# EAGLE board Orthogon - v2 panel (EAGLE 8.7.1)
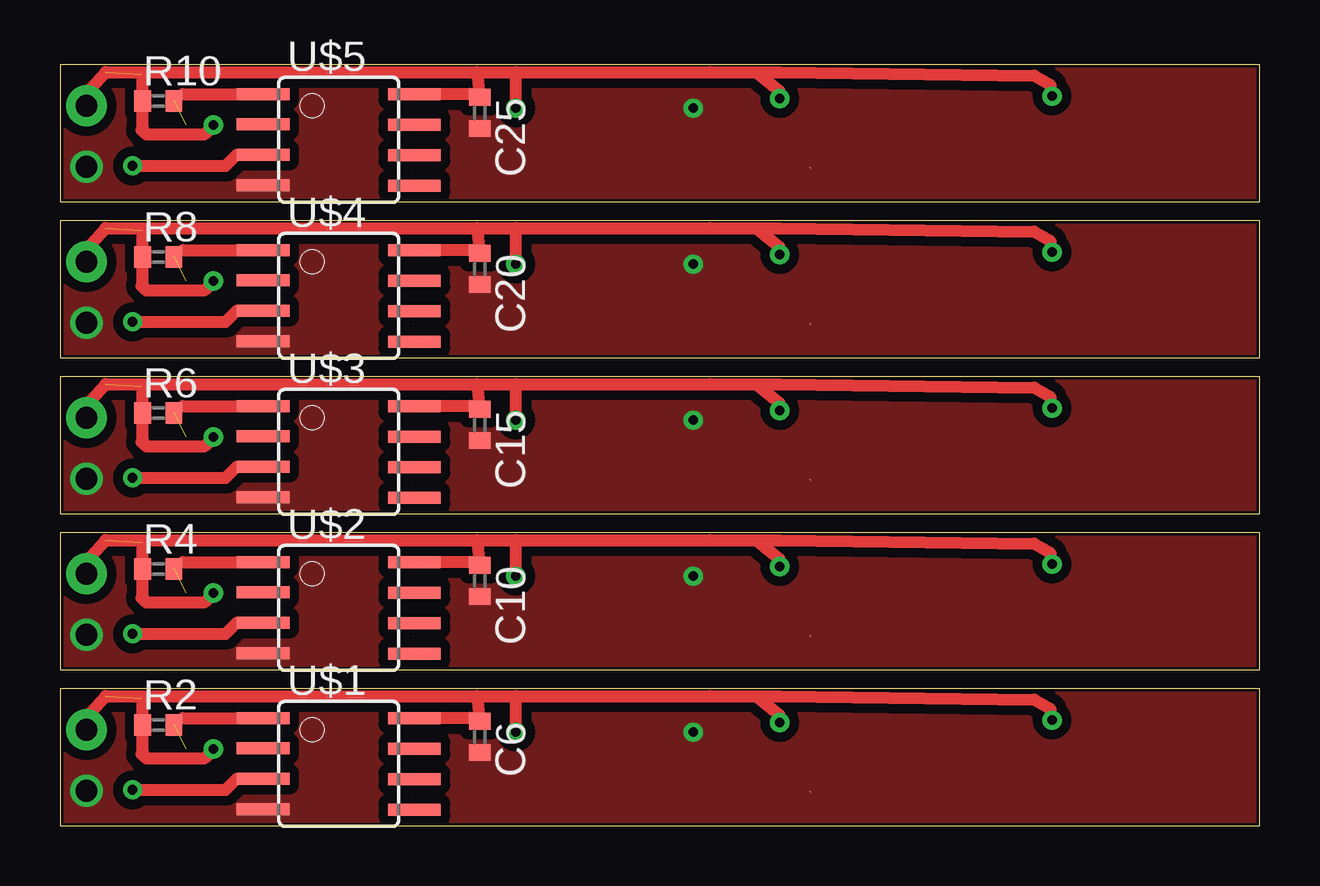
[diagram p0: board, top side]
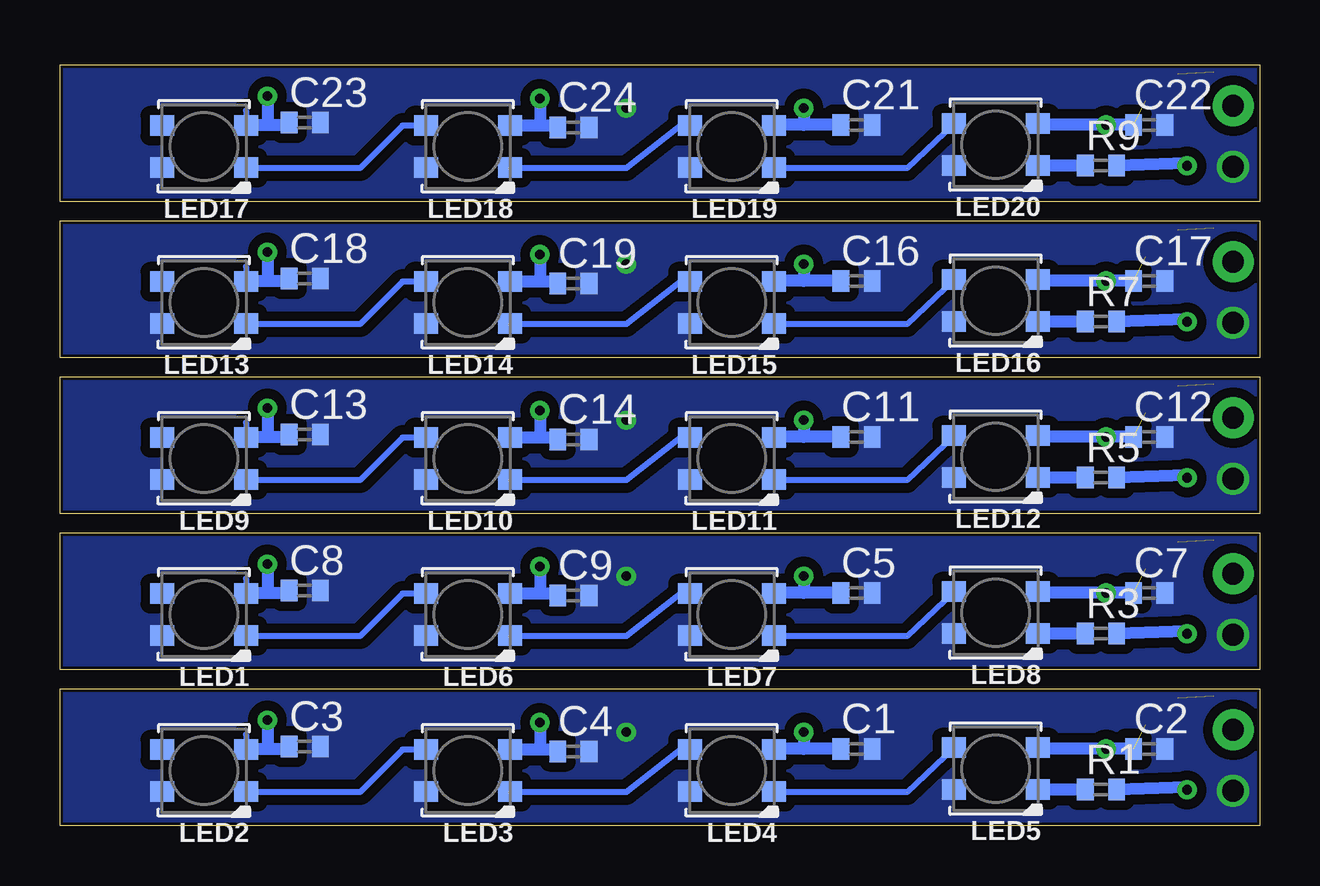
[diagram p1: board, bottom side, seen from below]

Size 50 x 31.7 mm. Coordinates in mm from the lower left corner, seen from the top.
Outline: 0,0 50,0 50,5.7 0,5.7 0,0
Outline: 0,6.5 50,6.5 50,12.2 0,12.2 0,6.5
Outline: 0,13 50,13 50,18.7 0,18.7 0,13
Outline: 0,19.5 50,19.5 50,25.2 0,25.2 0,19.5
Outline: 0,26 50,26 50,31.7 0,31.7 0,26
Copper layers (1*16): Top 0.035mm / dielectric 1.5mm / Bottom 0.035mm
Design rules "default *": minimum track width 0.25mm, minimum drill 0.4mm, track to track 0.4mm, track to pad 0.4mm, pad to pad 0.4mm, via to via 0.4mm, smd to smd 0.4mm, copper to edge 0.1mm, drill to drill 0.1mm, minimum pad ring 10mil, minimum via ring 8mil, stop-mask expansion 4mil, vias tented up to drill 0mil, thermal gap 10mil
Net classes: 1 Signal: width 0.25 mm, drill 0.4 mm, clearance 0.4 mm; 2 +5V: width 0.5 mm, drill 0.4 mm, clearance 0.4 mm; 5 CLEAR: width 0.1 mm, drill 0.4 mm, clearance 1.5 mm

## Footprints (pad centres in the part's own frame; a part is rotated, then mirrored left to right if it is on the bottom)
C0402 = smd 0.7 x 0.9: 1 -0.65,0; 2 0.65,0
LED3535 = smd 1 x 0.85: 1 -1.75,0.875; 2 -1.75,-0.875; 3 1.75,-0.875; 4 1.75,0.875
R0402 = smd 0.7 x 0.9: 1 -0.65,0; 2 0.65,0
SOIC8 = smd 0.5 x 2.2: 1 -1.905,-3.154; 2 -0.645,-3.154; 3 0.625,-3.154; 4 1.895,-3.154; 5 1.905,3.154; 6 0.635,3.154; 7 -0.635,3.154; 8 -1.905,3.154

## Placement (x,y rotation side)
C1  100 nF  [C0402]  16.8,3.2 0 bottom
C2  100 nF  [C0402]  4.6,3.2 0 bottom
C3  100 nF  [C0402]  39.8,3.3 0 bottom
C4  100 nF  [C0402]  28.6,3.1 0 bottom
C5  100 nF  [C0402]  16.8,9.7 0 bottom
C6  100 nF  [C0402]  17.5,3.7 270 top
C7  100 nF  [C0402]  4.6,9.7 0 bottom
C8  100 nF  [C0402]  39.8,9.8 0 bottom
C9  100 nF  [C0402]  28.6,9.6 0 bottom
C10  100 nF  [C0402]  17.5,10.2 270 top
C11  100 nF  [C0402]  16.8,16.2 0 bottom
C12  100 nF  [C0402]  4.6,16.2 0 bottom
C13  100 nF  [C0402]  39.8,16.3 0 bottom
C14  100 nF  [C0402]  28.6,16.1 0 bottom
C15  100 nF  [C0402]  17.5,16.7 270 top
C16  100 nF  [C0402]  16.8,22.7 0 bottom
C17  100 nF  [C0402]  4.6,22.7 0 bottom
C18  100 nF  [C0402]  39.8,22.8 0 bottom
C19  100 nF  [C0402]  28.6,22.6 0 bottom
C20  100 nF  [C0402]  17.5,23.2 270 top
C21  100 nF  [C0402]  16.8,29.2 0 bottom
C22  100 nF  [C0402]  4.6,29.2 0 bottom
C23  100 nF  [C0402]  39.8,29.3 0 bottom
C24  100 nF  [C0402]  28.6,29.1 0 bottom
C25  100 nF  [C0402]  17.5,29.7 270 top
LED1  WS2812B3535  [LED3535]  44,8.8 180 bottom
LED2  WS2812B3535  [LED3535]  44,2.3 180 bottom
LED3  WS2812B3535  [LED3535]  33,2.3 180 bottom
LED4  WS2812B3535  [LED3535]  22,2.3 180 bottom
LED5  WS2812B3535  [LED3535]  11,2.38 180 bottom
LED6  WS2812B3535  [LED3535]  33,8.8 180 bottom
LED7  WS2812B3535  [LED3535]  22,8.8 180 bottom
LED8  WS2812B3535  [LED3535]  11,8.88 180 bottom
LED9  WS2812B3535  [LED3535]  44,15.3 180 bottom
LED10  WS2812B3535  [LED3535]  33,15.3 180 bottom
LED11  WS2812B3535  [LED3535]  22,15.3 180 bottom
LED12  WS2812B3535  [LED3535]  11,15.38 180 bottom
LED13  WS2812B3535  [LED3535]  44,21.8 180 bottom
LED14  WS2812B3535  [LED3535]  33,21.8 180 bottom
LED15  WS2812B3535  [LED3535]  22,21.8 180 bottom
LED16  WS2812B3535  [LED3535]  11,21.88 180 bottom
LED17  WS2812B3535  [LED3535]  44,28.3 180 bottom
LED18  WS2812B3535  [LED3535]  33,28.3 180 bottom
LED19  WS2812B3535  [LED3535]  22,28.3 180 bottom
LED20  WS2812B3535  [LED3535]  11,28.38 180 bottom
R1  470  [R0402]  6.61,1.51 0 bottom
R2  10K  [R0402]  4.1,4.2 0 top
R3  470  [R0402]  6.61,8.01 0 bottom
R4  10K  [R0402]  4.1,10.7 0 top
R5  470  [R0402]  6.61,14.51 0 bottom
R6  10K  [R0402]  4.1,17.2 0 top
R7  470  [R0402]  6.61,21.01 0 bottom
R8  10K  [R0402]  4.1,23.7 0 top
R9  470  [R0402]  6.61,27.51 0 bottom
R10  10K  [R0402]  4.1,30.2 0 top
U$1  TINY25/45/85-20SU  [SOIC8]  11.62,2.58 270 top
U$2  TINY25/45/85-20SU  [SOIC8]  11.62,9.08 270 top
U$3  TINY25/45/85-20SU  [SOIC8]  11.62,15.58 270 top
U$4  TINY25/45/85-20SU  [SOIC8]  11.62,22.08 270 top
U$5  TINY25/45/85-20SU  [SOIC8]  11.62,28.58 270 top

## Library data of the parts
C1-C25 R1-R10 = resistor
LED1-LED20 = adafruit
U$1-U$5 = avr-7

## Nets
+5V [+5V]: C1.1 C2.1 C3.1 C4.1 C6.1 LED2.2 LED3.2 LED4.2 LED5.2 R2.1 R2.2 U$1.1 U$1.8
+5V1 [+5V]: C5.1 C7.1 C8.1 C9.1 C10.1 LED1.2 LED6.2 LED7.2 LED8.2 R4.1 R4.2 U$2.1 U$2.8
+5V2 [+5V]: C11.1 C12.1 C13.1 C14.1 C15.1 LED9.2 LED10.2 LED11.2 LED12.2 R6.1 R6.2 U$3.1 U$3.8
+5V3 [+5V]: C16.1 C17.1 C18.1 C19.1 C20.1 LED13.2 LED14.2 LED15.2 LED16.2 R8.1 R8.2 U$4.1 U$4.8
+5V4 [+5V]: C21.1 C22.1 C23.1 C24.1 C25.1 LED17.2 LED18.2 LED19.2 LED20.2 R10.1 R10.2 U$5.1 U$5.8
D1 [Signal]: LED7.1 LED8.3
D2 [Signal]: LED6.1 LED7.3
D3 [Signal]: LED1.1 LED6.3
D4 [Signal]: LED11.1 LED12.3
D5 [Signal]: LED10.1 LED11.3
D6 [Signal]: LED9.1 LED10.3
D7 [Signal]: LED15.1 LED16.3
D8 [Signal]: LED14.1 LED15.3
D9 [Signal]: LED13.1 LED14.3
D10 [Signal]: LED19.1 LED20.3
D11 [Signal]: LED18.1 LED19.3
D12 [Signal]: LED4.1 LED5.3
D13 [Signal]: LED17.1 LED18.3
D23 [Signal]: LED3.1 LED4.3
D34 [Signal]: LED2.1 LED3.3
D_IN: R1.2 U$1.3
D_IN1: R3.2 U$2.3
D_IN2: R5.2 U$3.3
D_IN3: R7.2 U$4.3
D_IN4: R9.2 U$5.3
DI1 [Signal]: LED5.1 R1.1
DI2 [Signal]: LED8.1 R3.1
DI3 [Signal]: LED12.1 R5.1
DI4 [Signal]: LED16.1 R7.1
DI5 [Signal]: LED20.1 R9.1
GND [GND]: C1.2 C2.2 C3.2 C4.2 C6.2 LED2.4 LED3.4 LED4.4 LED5.4 U$1.4
GND1 [GND]: C5.2 C7.2 C8.2 C9.2 C10.2 LED1.4 LED6.4 LED7.4 LED8.4 U$2.4
GND2 [GND]: C11.2 C12.2 C13.2 C14.2 C15.2 LED9.4 LED10.4 LED11.4 LED12.4 U$3.4
GND3 [GND]: C16.2 C17.2 C18.2 C19.2 C20.2 LED13.4 LED14.4 LED15.4 LED16.4 U$4.4
GND4 [GND]: C21.2 C22.2 C23.2 C24.2 C25.2 LED17.4 LED18.4 LED19.4 LED20.4 U$5.4

## Tracks (layer width: path | path; a pad name or v marks a point on that pad's centre or on a via)
+5V  (via drill 0.4, 0.9 pad 1.7)  (2 unrouted)
  Top 0.102: 41.45,4.7 v41.35,4.4
  Top 0.152: v1.1,4 1.8,4 | R2.2 5.13,4.49
  Top 0.254: 41.3,4.85 41.3,4.61 | 30,4.59 v30,4.3 | C6.1 17.16,4.49
  Top 0.5: 40.6,5.25 30,5.39 29,5.39 27.1,5.4 19,5.4 17.4,5.4 1.9,5.4 1.1,4.5 v1.1,4 | 41.3,4.61 v41.35,4.4
  Top 0.508: 40.6,5.25 41.3,4.85 | v19,3.9 19,5.4 | 29,5.39 30,4.59 | C6.1 17.4,5.4 | 17.16,4.49 U$1.8 | 5.13,4.49 U$1.1 | v6.4,3.2 6,2.8 3.6,2.8 3.4,3 3.45,3.05 R2.1 3.45,5.27 3.4,5.32
  Bottom 0.152: 9.2,3.2 LED5.2
  Bottom 0.254: 42.25,3.8 42.25,3.2 LED2.2 | 40.45,3.2 C3.1 | C4.1 29.25,3.18 | 20.25,3.2 LED4.2
  Bottom 0.508: 42.25,3.2 41.35,3.2 | 41.35,3.2 40.45,3.2 | 29.25,3.18 30,3.18 | 30,3.18 LED3.2 | v30,4.3 30,3.18 | v41.35,4.4 41.35,3.2 | C1.1 19,3.2 | 19,3.2 20.25,3.2 | v19,3.9 19,3.2 | C2.1 v6.4,3.2 9.2,3.2
+5V1  (via drill 0.4, 0.9 pad 1.7)  (2 unrouted)
  Top 0.102: 41.45,11.2 v41.35,10.9
  Top 0.152: v1.1,10.5 1.8,10.5 | R4.2 5.13,10.98
  Top 0.254: 41.3,11.35 41.3,11.11 | 30,11.09 v30,10.8 | C10.1 17.16,10.98
  Top 0.5: 40.6,11.75 30,11.89 29,11.89 27.1,11.9 19,11.9 17.4,11.9 1.9,11.9 1.1,11 v1.1,10.5 | 41.3,11.11 v41.35,10.9
  Top 0.508: 40.6,11.75 41.3,11.35 | v19,10.4 19,11.9 | 29,11.89 30,11.09 | C10.1 17.4,11.9 | 17.16,10.98 U$2.8 | 5.13,10.98 U$2.1 | v6.4,9.7 6,9.3 3.6,9.3 3.4,9.5 3.45,9.55 R4.1 3.45,11.77 3.4,11.82
  Bottom 0.152: 9.2,9.7 LED8.2
  Bottom 0.254: 42.25,10.3 42.25,9.7 LED1.2 | 40.45,9.7 C8.1 | C9.1 29.25,9.67 | 20.25,9.7 LED7.2
  Bottom 0.508: 42.25,9.7 41.35,9.7 | 41.35,9.7 40.45,9.7 | 29.25,9.67 30,9.67 | 30,9.67 LED6.2 | v30,10.8 30,9.67 | v41.35,10.9 41.35,9.7 | C5.1 19,9.7 | 19,9.7 20.25,9.7 | v19,10.4 19,9.7 | C7.1 v6.4,9.7 9.2,9.7
+5V2  (via drill 0.4, 0.9 pad 1.7)  (2 unrouted)
  Top 0.102: 41.45,17.7 v41.35,17.4
  Top 0.152: v1.1,17 1.8,17 | R6.2 5.13,17.48
  Top 0.254: 41.3,17.85 41.3,17.61 | 30,17.59 v30,17.3 | C15.1 17.16,17.48
  Top 0.5: 40.6,18.25 30,18.39 29,18.39 27.1,18.4 19,18.4 17.4,18.4 1.9,18.4 1.1,17.5 v1.1,17 | 41.3,17.61 v41.35,17.4
  Top 0.508: 40.6,18.25 41.3,17.85 | v19,16.9 19,18.4 | 29,18.39 30,17.59 | C15.1 17.4,18.4 | 17.16,17.48 U$3.8 | 5.13,17.48 U$3.1 | v6.4,16.2 6,15.8 3.6,15.8 3.4,16 3.45,16.05 R6.1 3.45,18.27 3.4,18.32
  Bottom 0.152: 9.2,16.2 LED12.2
  Bottom 0.254: 42.25,16.8 42.25,16.2 LED9.2 | 40.45,16.2 C13.1 | C14.1 29.25,16.18 | 20.25,16.2 LED11.2
  Bottom 0.508: 42.25,16.2 41.35,16.2 | 41.35,16.2 40.45,16.2 | 29.25,16.18 30,16.18 | 30,16.18 LED10.2 | v30,17.3 30,16.18 | v41.35,17.4 41.35,16.2 | C11.1 19,16.2 | 19,16.2 20.25,16.2 | v19,16.9 19,16.2 | C12.1 v6.4,16.2 9.2,16.2
+5V3  (via drill 0.4, 0.9 pad 1.7)  (2 unrouted)
  Top 0.102: 41.45,24.2 v41.35,23.9
  Top 0.152: v1.1,23.5 1.8,23.5 | R8.2 5.13,23.98
  Top 0.254: 41.3,24.35 41.3,24.11 | 30,24.09 v30,23.8 | C20.1 17.16,23.98
  Top 0.5: 40.6,24.75 30,24.89 29,24.89 27.1,24.9 19,24.9 17.4,24.9 1.9,24.9 1.1,24 v1.1,23.5 | 41.3,24.11 v41.35,23.9
  Top 0.508: 40.6,24.75 41.3,24.35 | v19,23.4 19,24.9 | 29,24.89 30,24.09 | C20.1 17.4,24.9 | 17.16,23.98 U$4.8 | 5.13,23.98 U$4.1 | v6.4,22.7 6,22.3 3.6,22.3 3.4,22.5 3.45,22.55 R8.1 3.45,24.77 3.4,24.82
  Bottom 0.152: 9.2,22.7 LED16.2
  Bottom 0.254: 42.25,23.3 42.25,22.7 LED13.2 | 40.45,22.7 C18.1 | C19.1 29.25,22.68 | 20.25,22.7 LED15.2
  Bottom 0.508: 42.25,22.7 41.35,22.7 | 41.35,22.7 40.45,22.7 | 29.25,22.68 30,22.68 | 30,22.68 LED14.2 | v30,23.8 30,22.68 | v41.35,23.9 41.35,22.7 | C16.1 19,22.7 | 19,22.7 20.25,22.7 | v19,23.4 19,22.7 | C17.1 v6.4,22.7 9.2,22.7
+5V4  (via drill 0.4, 0.9 pad 1.7)  (2 unrouted)
  Top 0.102: 41.45,30.7 v41.35,30.4
  Top 0.152: v1.1,30 1.8,30 | R10.2 5.13,30.48
  Top 0.254: 41.3,30.85 41.3,30.61 | 30,30.59 v30,30.3 | C25.1 17.16,30.48
  Top 0.5: 40.6,31.25 30,31.39 29,31.39 27.1,31.4 19,31.4 17.4,31.4 1.9,31.4 1.1,30.5 v1.1,30 | 41.3,30.61 v41.35,30.4
  Top 0.508: 40.6,31.25 41.3,30.85 | v19,29.9 19,31.4 | 29,31.39 30,30.59 | C25.1 17.4,31.4 | 17.16,30.48 U$5.8 | 5.13,30.48 U$5.1 | v6.4,29.2 6,28.8 3.6,28.8 3.4,29 3.45,29.05 R10.1 3.45,31.27 3.4,31.32
  Bottom 0.152: 9.2,29.2 LED20.2
  Bottom 0.254: 42.25,29.8 42.25,29.2 LED17.2 | 40.45,29.2 C23.1 | C24.1 29.25,29.18 | 20.25,29.2 LED19.2
  Bottom 0.508: 42.25,29.2 41.35,29.2 | 41.35,29.2 40.45,29.2 | 29.25,29.18 30,29.18 | 30,29.18 LED18.2 | v30,30.3 30,29.18 | v41.35,30.4 41.35,29.2 | C21.1 19,29.2 | 19,29.2 20.25,29.2 | v19,29.9 19,29.2 | C22.1 v6.4,29.2 9.2,29.2
CLEAR
  cutout Bottom (no thermals): 9.25,0.75 12.65,0.75 12.65,4.1 9.3,4.1 9.25,4.15
  cutout Bottom (no thermals): 20.25,0.65 23.65,0.65 23.65,4 20.3,4 20.25,4.05
  cutout Bottom (no thermals): 31.25,0.65 34.65,0.65 34.65,4 31.3,4 31.25,4.05
  cutout Bottom (no thermals): 42.25,0.65 45.65,0.65 45.65,4 42.3,4 42.25,4.05
CLEAR1
  cutout Bottom (no thermals): 9.25,7.25 12.65,7.25 12.65,10.6 9.3,10.6 9.25,10.65
  cutout Bottom (no thermals): 20.25,7.15 23.65,7.15 23.65,10.5 20.3,10.5 20.25,10.55
  cutout Bottom (no thermals): 31.25,7.15 34.65,7.15 34.65,10.5 31.3,10.5 31.25,10.55
  cutout Bottom (no thermals): 42.25,7.15 45.65,7.15 45.65,10.5 42.3,10.5 42.25,10.55
CLEAR2
  cutout Bottom (no thermals): 9.25,13.75 12.65,13.75 12.65,17.1 9.3,17.1 9.25,17.15
  cutout Bottom (no thermals): 20.25,13.65 23.65,13.65 23.65,17 20.3,17 20.25,17.05
  cutout Bottom (no thermals): 31.25,13.65 34.65,13.65 34.65,17 31.3,17 31.25,17.05
  cutout Bottom (no thermals): 42.25,13.65 45.65,13.65 45.65,17 42.3,17 42.25,17.05
CLEAR3
  cutout Bottom (no thermals): 9.25,20.25 12.65,20.25 12.65,23.6 9.3,23.6 9.25,23.65
  cutout Bottom (no thermals): 20.25,20.15 23.65,20.15 23.65,23.5 20.3,23.5 20.25,23.55
  cutout Bottom (no thermals): 31.25,20.15 34.65,20.15 34.65,23.5 31.3,23.5 31.25,23.55
  cutout Bottom (no thermals): 42.25,20.15 45.65,20.15 45.65,23.5 42.3,23.5 42.25,23.55
CLEAR4
  cutout Bottom (no thermals): 9.25,26.75 12.65,26.75 12.65,30.1 9.3,30.1 9.25,30.15
  cutout Bottom (no thermals): 20.25,26.65 23.65,26.65 23.65,30 20.3,30 20.25,30.05
  cutout Bottom (no thermals): 31.25,26.65 34.65,26.65 34.65,30 31.3,30 31.25,30.05
  cutout Bottom (no thermals): 42.25,26.65 45.65,26.65 45.65,30 42.3,30 42.25,30.05
D1  (1 unrouted)
  Bottom 0.254: LED8.3 14.7,7.91 | 14.7,7.9 20.23,7.9 LED7.1
D2  (1 unrouted)
  Bottom 0.25: 26.4,7.9 24,9.8
  Bottom 0.254: 26.4,7.9 31.3,7.9 | 24,9.8 23.88,9.67 LED7.3
D3
  Bottom 0.254: LED6.3 35.73,9.67 37.5,7.9 42.23,7.9 LED1.1
D4  (1 unrouted)
  Bottom 0.254: LED12.3 14.7,14.4 | 14.7,14.4 20.23,14.4 LED11.1
D5  (1 unrouted)
  Bottom 0.25: 26.4,14.4 24,16.3
  Bottom 0.254: 26.4,14.4 31.3,14.4 | 24,16.3 23.88,16.18 LED11.3
D6
  Bottom 0.254: LED10.3 35.73,16.18 37.5,14.4 42.23,14.4 LED9.1
D7  (1 unrouted)
  Bottom 0.254: LED16.3 14.7,20.9 | 14.7,20.9 20.23,20.9 LED15.1
D8  (1 unrouted)
  Bottom 0.25: 26.4,20.9 24,22.8
  Bottom 0.254: 26.4,20.9 31.3,20.9 | 24,22.8 23.88,22.68 LED15.3
D9
  Bottom 0.254: LED14.3 35.73,22.68 37.5,20.9 42.23,20.9 LED13.1
D10  (1 unrouted)
  Bottom 0.254: LED20.3 14.7,27.4 | 14.7,27.4 20.23,27.4 LED19.1
D11  (1 unrouted)
  Bottom 0.25: 26.4,27.4 24,29.3
  Bottom 0.254: 26.4,27.4 31.3,27.4 | 24,29.3 23.88,29.18 LED19.3
D12  (1 unrouted)
  Bottom 0.254: LED5.3 14.7,1.41 | 14.7,1.4 20.23,1.4 LED4.1
D13
  Bottom 0.254: LED18.3 35.73,29.18 37.5,27.4 42.23,27.4 LED17.1
D23  (1 unrouted)
  Bottom 0.25: 26.4,1.4 24,3.3
  Bottom 0.254: 26.4,1.4 31.3,1.4 | 24,3.3 23.88,3.18 LED4.3
D34
  Bottom 0.254: LED3.3 35.73,3.18 37.5,1.4 42.23,1.4 LED2.1
D_IN  (via drill 0.4 pad 0.8)
  Top 0.152: 8.31,1.9 U$1.3
  Top 0.508: v3.03,1.5 6.9,1.5 7.36,1.95 U$1.3
  Bottom 0.152: v3.03,1.5 3.04,1.61
  Bottom 0.508: 3.04,1.61 R1.2
D_IN1  (via drill 0.4 pad 0.8)
  Top 0.152: 8.31,8.4 U$2.3
  Top 0.508: v3.03,8 6.9,8 7.36,8.46 U$2.3
  Bottom 0.152: v3.03,8 3.04,8.11
  Bottom 0.508: 3.04,8.11 R3.2
D_IN2  (via drill 0.4 pad 0.8)
  Top 0.152: 8.31,14.9 U$3.3
  Top 0.508: v3.03,14.5 6.9,14.5 7.36,14.96 U$3.3
  Bottom 0.152: v3.03,14.5 3.04,14.61
  Bottom 0.508: 3.04,14.61 R5.2
D_IN3  (via drill 0.4 pad 0.8)
  Top 0.152: 8.31,21.4 U$4.3
  Top 0.508: v3.03,21 6.9,21 7.36,21.45 U$4.3
  Bottom 0.152: v3.03,21 3.04,21.11
  Bottom 0.508: 3.04,21.11 R7.2
D_IN4  (via drill 0.4 pad 0.8)
  Top 0.152: 8.31,27.9 U$5.3
  Top 0.508: v3.03,27.5 6.9,27.5 7.36,27.95 U$5.3
  Bottom 0.152: v3.03,27.5 3.04,27.61
  Bottom 0.508: 3.04,27.61 R9.2
DI1
  Bottom 0.254: 9.14,1.61 LED5.1 9,1.25 9,1.5 | R1.1 7.37,1.5
  Bottom 0.508: 7.37,1.5 9,1.5
DI2
  Bottom 0.254: 9.14,8.11 LED8.1 9,7.75 9,8 | R3.1 7.37,8
  Bottom 0.508: 7.37,8 9,8
DI3
  Bottom 0.254: 9.14,14.61 LED12.1 9,14.25 9,14.5 | R5.1 7.37,14.5
  Bottom 0.508: 7.37,14.5 9,14.5
DI4
  Bottom 0.254: 9.14,21.11 LED16.1 9,20.75 9,21 | R7.1 7.37,21
  Bottom 0.508: 7.37,21 9,21
DI5
  Bottom 0.254: 9.14,27.61 LED20.1 9,27.25 9,27.5 | R9.1 7.37,27.5
  Bottom 0.508: 7.37,27.5 9,27.5
GND  (via drill 0.4, 0.9)
  other vias: 1.1,1.46 26.4,3.9
  pour Bottom (no thermals): 0.1,-0.2 55.2,0.1 55.2,5.9 0.1,5.9
  pour Top (no thermals): -0.6,-1.1 57.4,-1.1 56.4,-0.1 56.4,6.7 -0.6,6.7
GND1  (via drill 0.4, 0.9)
  other vias: 1.1,7.96 26.4,10.4
  pour Bottom (no thermals): 0.1,6.3 55.2,6.6 55.2,12.4 0.1,12.4
  pour Top (no thermals): -0.6,5.4 57.4,5.4 56.4,6.4 56.4,13.2 -0.6,13.2
GND2  (via drill 0.4, 0.9)
  other vias: 1.1,14.46 26.4,16.9
  pour Bottom (no thermals): 0.1,12.8 55.2,13.1 55.2,18.9 0.1,18.9
  pour Top (no thermals): -0.6,11.9 57.4,11.9 56.4,12.9 56.4,19.7 -0.6,19.7
GND3  (via drill 0.4, 0.9)
  other vias: 1.1,20.96 26.4,23.4
  pour Bottom (no thermals): 0.1,19.3 55.2,19.6 55.2,25.4 0.1,25.4
  pour Top (no thermals): -0.6,18.4 57.4,18.4 56.4,19.4 56.4,26.2 -0.6,26.2
GND4  (via drill 0.4, 0.9)
  other vias: 1.1,27.46 26.4,29.9
  pour Bottom (no thermals): 0.1,25.8 55.2,26.1 55.2,31.9 0.1,31.9
  pour Top (no thermals): -0.6,24.9 57.4,24.9 56.4,25.9 56.4,32.7 -0.6,32.7